# EAGLE board codec_controller (EAGLE 6.4)
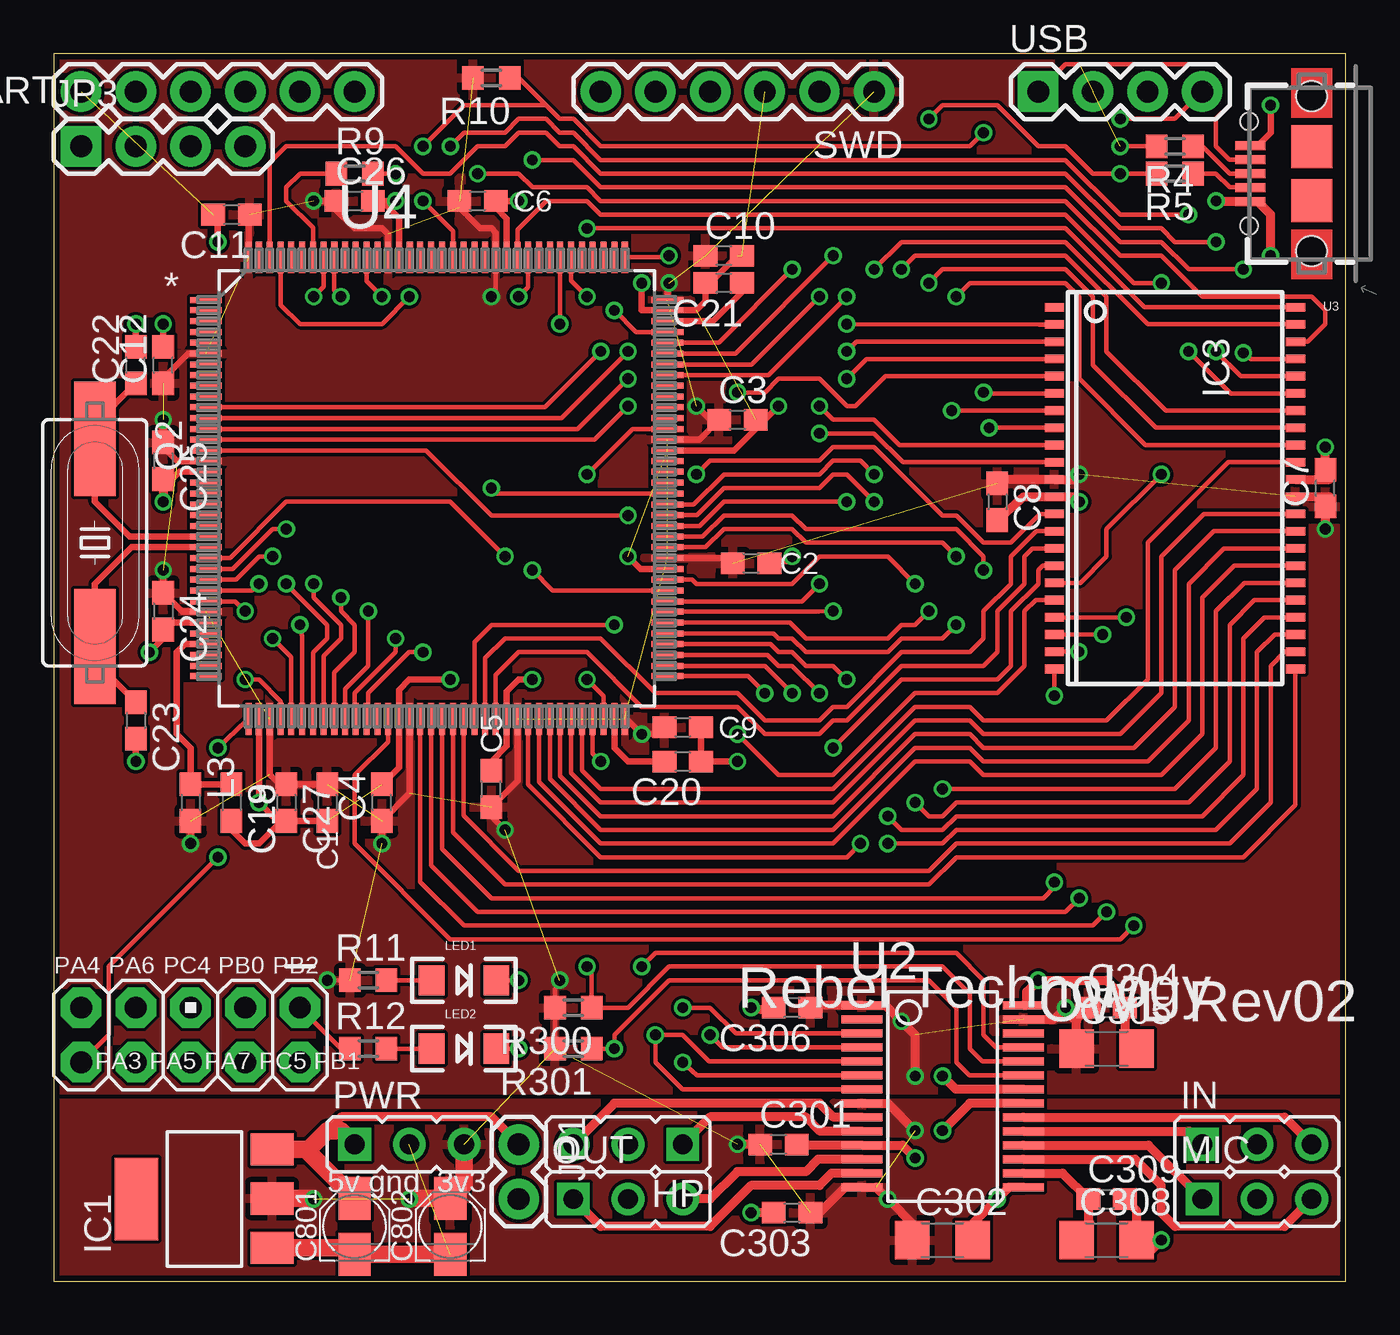
[diagram p0: board, top side]
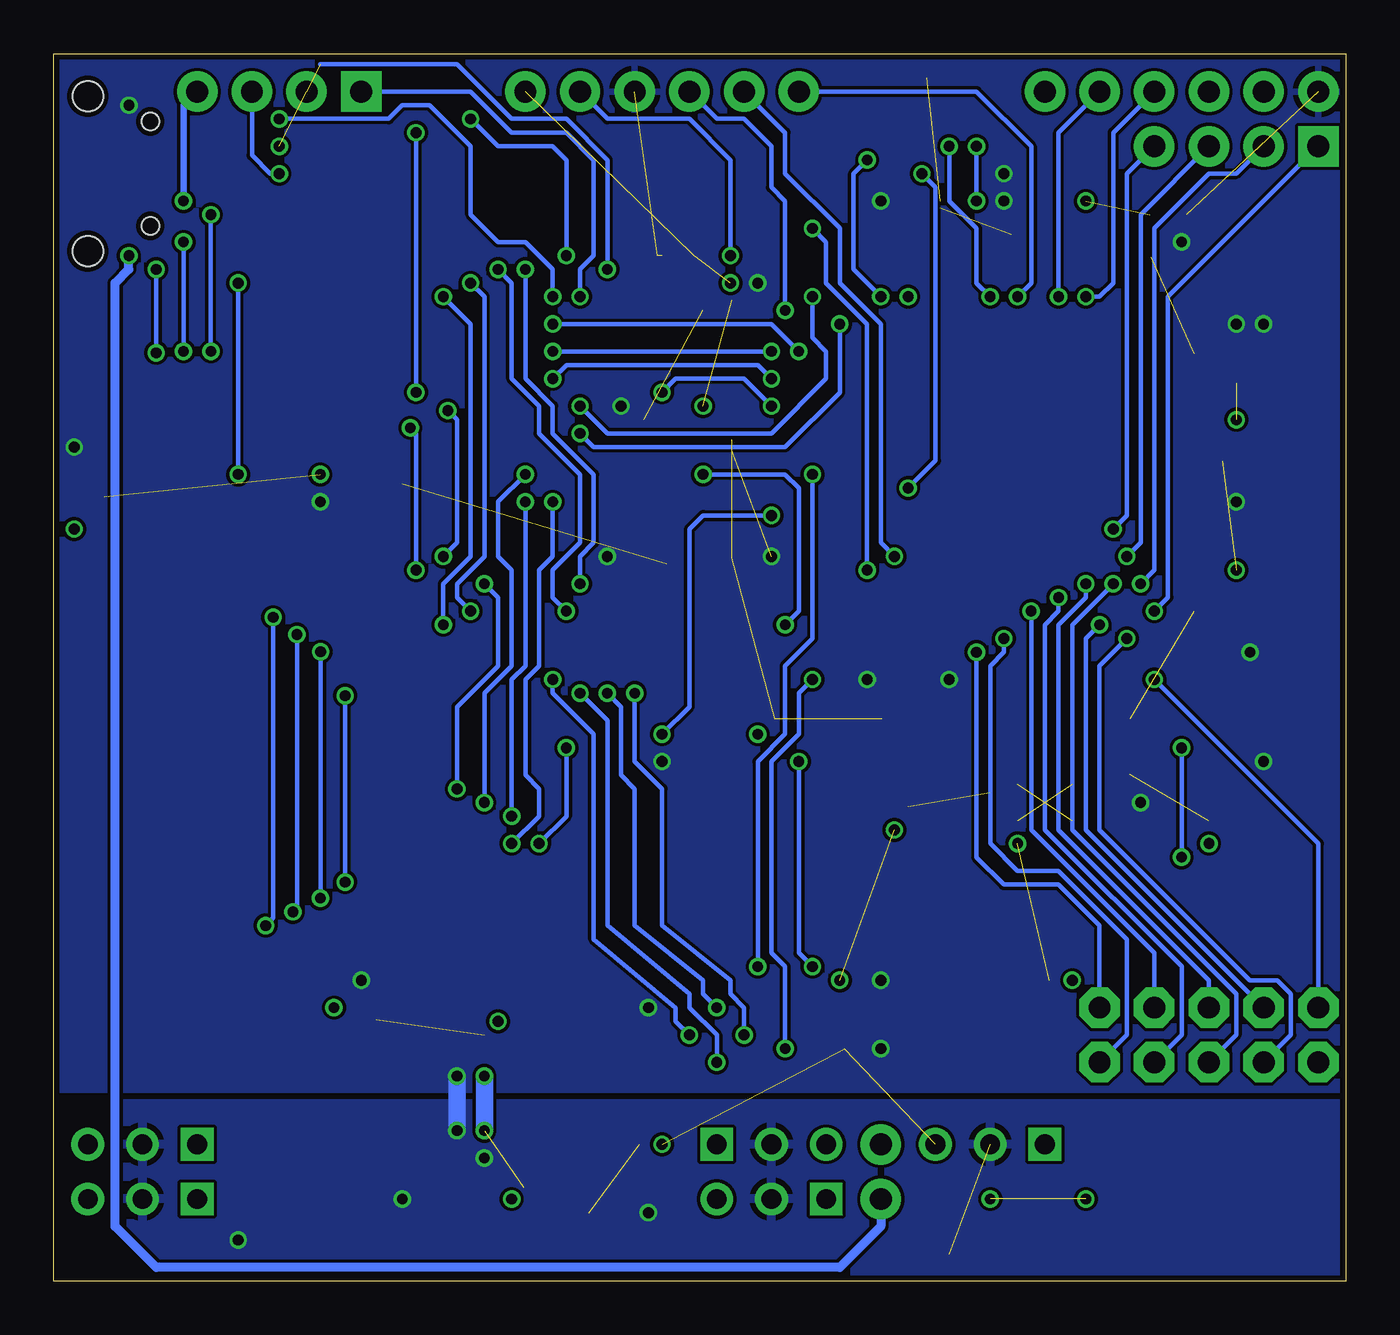
[diagram p1: board, bottom side, seen from below]

Size 60 x 57 mm. Coordinates in mm from the lower left corner, seen from the top.
Outline: 0,0 60,0 60,57 0,57 0,0
Copper layers (1*16): Top 0.035mm / dielectric 1.5mm / Bottom 0.035mm
Design rules "default *": minimum track width 6mil, minimum drill 12mil, track to track 6mil, track to pad 6mil, pad to pad 6mil, via to via 6mil, smd to smd 0mil, copper to edge 10mil, drill to drill 10mil, minimum pad ring 12mil, minimum via ring 6mil, stop-mask expansion 2mil, vias tented up to drill 100mil, thermal gap 10mil

## Footprints (pad centres in the part's own frame; a part is rotated, then mirrored left to right if it is on the bottom)
C0603 = smd 1.1 x 1: 1 -0.85,0; 2 0.85,0
C1206 = smd 1.6 x 1.8: 1 -1.4,0; 2 1.4,0
PANASONIC_A = smd 2 x 1.5: + 1.3,0; - -1.3,0
JMP/3P/SIP = drill 0.914 pad 1.524 square: 1 -2.54,0 | drill 0.914 pad 1.524: 2 0,0; 3 2.54,0
SOT223 = smd 1.499 x 2.007: 1 -2.261,-3.15; 2 0.025,-3.15; 3 2.311,-3.15 | smd 3.81 x 2.007: 4 0,3.15
TSOP44-II = smd 0.4 x 0.9: 1 -8.4,-5.6; 2 -7.6,-5.6; 3 -6.8,-5.6; 4 -6,-5.6; 5 -5.2,-5.6; 6 -4.4,-5.6; 7 -3.6,-5.6; 8 -2.8,-5.6; 9 -2,-5.6; 10 -1.2,-5.6; 11 -0.4,-5.6; 12 0.4,-5.6; 13 1.2,-5.6; 14 2,-5.6; 15 2.8,-5.6; 16 3.6,-5.6; 17 4.4,-5.6; 18 5.2,-5.6; 19 6,-5.6; 20 6.8,-5.6; 21 7.6,-5.6; 22 8.4,-5.6; 23 8.4,5.6; 24 7.6,5.6; 25 6.8,5.6; 26 6,5.6; 27 5.2,5.6; 28 4.4,5.6; 29 3.6,5.6; 30 2.8,5.6; 31 2,5.6; 32 1.2,5.6; 33 0.4,5.6; 34 -0.4,5.6; 35 -1.2,5.6; 36 -2,5.6; 37 -2.8,5.6; 38 -3.6,5.6; 39 -4.4,5.6; 40 -5.2,5.6; 41 -6,5.6; 42 -6.8,5.6; 43 -7.6,5.6; 44 -8.4,5.6
1X02 = drill 1.016 pad 1.88: 1 0,0; 2 2.54,0
AVR_ICSP = drill 1.016 pad 1.88 octagon: 1 -1.27,5.08; 2 1.27,5.08; 3 -1.27,2.54; 4 1.27,2.54; 5 -1.27,0; 6 1.27,0; 7 -1.27,-2.54; 8 1.27,-2.54; 9 -1.27,-5.08; 10 1.27,-5.08
1X04 = drill 1.016 pad 1.88 square: 1 0,0 | drill 1.016 pad 1.88: 2 2.54,0; 3 5.08,0; 4 7.62,0
0603 = smd 1.1 x 1: 1 -0.85,0; 2 0.85,0
LED-1206 = smd 1.2 x 1.4: A -1.5,0; C 1.5,0
HC49UP = smd 5.334 x 1.93: 1 -4.826,0; 2 4.826,0
R0603 = smd 1 x 1.1: 1 -0.85,0; 2 0.85,0
1X06 = drill 1.016 pad 1.88: 1 0,0; 2 2.54,0; 3 5.08,0; 4 7.62,0; 5 10.16,0; 6 12.7,0
28-SSOP = smd 0.381 x 1.905: P$1 -4.55,-3.752; P$2 -3.9,-3.752; P$3 -3.25,-3.752; P$4 -2.6,-3.752; P$5 -1.95,-3.752; P$6 -1.3,-3.752; P$7 -0.65,-3.752; P$8 0,-3.752; P$9 0.65,-3.752; P$10 1.3,-3.752; P$11 1.95,-3.752; P$12 2.6,-3.752; P$13 3.25,-3.752; P$14 3.9,-3.752; P$15 3.9,3.752; P$16 3.25,3.752; P$17 2.6,3.752; P$18 1.95,3.752; P$19 1.3,3.752; P$20 0.65,3.752; P$21 0,3.752; P$22 -0.65,3.752; P$23 -1.3,3.752; P$24 -1.95,3.752; P$25 -2.6,3.752; P$26 -3.25,3.752; P$27 -3.9,3.752; P$28 -4.55,3.752
USB-AB-MICRO-SMD = smd 1.4 x 0.4: D+ 2.85,0; D- 2.85,0.65; GND 2.85,-1.3; ID 2.85,-0.65; VBUS 2.85,1.3 | smd 1.9 x 2: P$6 0,1.25; P$7 0,-1.25 | hole 1.4: 0,3.6; 0,-3.6 | hole 0.8: 2.9,2.425; 2.9,-2.425
QFP50P2200X2200X160-144N = smd 1.473 x 0.279: 1 -10.719,8.738; 2 -10.719,8.255; 3 -10.719,7.747; 4 -10.719,7.239; 5 -10.719,6.756; 6 -10.719,6.248; 7 -10.719,5.74; 8 -10.719,5.258; 9 -10.719,4.75; 10 -10.719,4.242; 11 -10.719,3.759; 12 -10.719,3.251; 13 -10.719,2.743; 14 -10.719,2.261; 15 -10.719,1.753; 16 -10.719,1.245; 17 -10.719,0.762; 18 -10.719,0.254; 19 -10.719,-0.254; 20 -10.719,-0.762; 21 -10.719,-1.245; 22 -10.719,-1.753; 23 -10.719,-2.261; 24 -10.719,-2.743; 25 -10.719,-3.251; 26 -10.719,-3.759; 27 -10.719,-4.242; 28 -10.719,-4.75; 29 -10.719,-5.258; 30 -10.719,-5.74; 31 -10.719,-6.248; 32 -10.719,-6.756; 33 -10.719,-7.239; 34 -10.719,-7.747; 35 -10.719,-8.255; 36 -10.719,-8.738; 73 10.719,-8.738; 74 10.719,-8.255; 75 10.719,-7.747; 76 10.719,-7.239; 77 10.719,-6.756; 78 10.719,-6.248; 79 10.719,-5.74; 80 10.719,-5.258; 81 10.719,-4.75; 82 10.719,-4.242; 83 10.719,-3.759; 84 10.719,-3.251; 85 10.719,-2.743; 86 10.719,-2.261; 87 10.719,-1.753; 88 10.719,-1.245; 89 10.719,-0.762; 90 10.719,-0.254; 91 10.719,0.254; 92 10.719,0.762; 93 10.719,1.245; 94 10.719,1.753; 95 10.719,2.261; 96 10.719,2.743; 97 10.719,3.251; 98 10.719,3.759; 99 10.719,4.242; 100 10.719,4.75; 101 10.719,5.258; 102 10.719,5.74; 103 10.719,6.248; 104 10.719,6.756; 105 10.719,7.239; 106 10.719,7.747; 107 10.719,8.255; 108 10.719,8.738 | smd 0.279 x 1.473: 37 -8.738,-10.719; 38 -8.255,-10.719; 39 -7.747,-10.719; 40 -7.239,-10.719; 41 -6.756,-10.719; 42 -6.248,-10.719; 43 -5.74,-10.719; 44 -5.258,-10.719; 45 -4.75,-10.719; 46 -4.242,-10.719; 47 -3.759,-10.719; 48 -3.251,-10.719; 49 -2.743,-10.719; 50 -2.261,-10.719; 51 -1.753,-10.719; 52 -1.245,-10.719; 53 -0.762,-10.719; 54 -0.254,-10.719; 55 0.254,-10.719; 56 0.762,-10.719; 57 1.245,-10.719; 58 1.753,-10.719; 59 2.261,-10.719; 60 2.743,-10.719; 61 3.251,-10.719; 62 3.759,-10.719; 63 4.242,-10.719; 64 4.75,-10.719; 65 5.258,-10.719; 66 5.74,-10.719; 67 6.248,-10.719; 68 6.756,-10.719; 69 7.239,-10.719; 70 7.747,-10.719; 71 8.255,-10.719; 72 8.738,-10.719; 109 8.738,10.719; 110 8.255,10.719; 111 7.747,10.719; 112 7.239,10.719; 113 6.756,10.719; 114 6.248,10.719; 115 5.74,10.719; 116 5.258,10.719; 117 4.75,10.719; 118 4.242,10.719; 119 3.759,10.719; 120 3.251,10.719; 121 2.743,10.719; 122 2.261,10.719; 123 1.753,10.719; 124 1.245,10.719; 125 0.762,10.719; 126 0.254,10.719; 127 -0.254,10.719; 128 -0.762,10.719; 129 -1.245,10.719; 130 -1.753,10.719; 131 -2.261,10.719; 132 -2.743,10.719; 133 -3.251,10.719; 134 -3.759,10.719; 135 -4.242,10.719; 136 -4.75,10.719; 137 -5.258,10.719; 138 -5.74,10.719; 139 -6.248,10.719; 140 -6.756,10.719; 141 -7.239,10.719; 142 -7.747,10.719; 143 -8.255,10.719; 144 -8.738,10.719

## Placement (x,y rotation side)
C1  1u  [C0603]  12.7,22.23 270 top
C2  100n  [C0603]  32.38,33.34 0 top
C3  100n  [C0603]  31.75,40.01 0 top
C4  100n  [C0603]  15.24,22.23 90 top
C5  100n  [C0603]  20.32,22.86 90 top
C6  100n  [C0603]  19.68,50.16 0 top
C7  100n  [C0603]  59.05,36.83 90 top
C8  100n  [C0603]  43.81,36.2 270 top
C9  100n  [C0603]  29.21,25.72 0 top
C10  100n  [C0603]  31.11,47.62 0 top
C11  100n  [C0603]  8.26,49.53 180 top
C12  100n  [C0603]  5.08,42.55 90 top
C18  1u  [C0603]  8.26,22.23 270 top
C19  100n  [C0603]  8.26,22.23 270 top
C20  2u2  [C0603]  29.21,24.13 180 top
C21  2u2  [C0603]  31.11,46.35 180 top
C22  20pF  [C0603]  3.81,42.55 90 top
C23  20pF  [C0603]  3.81,26.04 270 top
C24  100n  [C0603]  5.08,31.11 270 top
C25  100n  [C0603]  5.08,38.1 270 top
C26  100n  [C0603]  13.97,50.16 0 top
C27  100n  [C0603]  10.79,22.23 270 top
C301  100n  [C0603]  33.66,6.35 0 top
C302  10u  [C1206]  41.27,1.91 0 top
C303  100n  [C0603]  34.29,3.17 180 top
C304  100n  [C0603]  48.9,12.7 0 top
C305  10u  [C1206]  48.9,10.79 0 top
C306  100n  [C0603]  34.29,12.7 180 top
C308  10u  [C1206]  48.9,1.91 0 top
C309  100n  [C0603]  48.9,3.81 0 top
C801  10u  [PANASONIC_A]  13.97,2.54 90 top
C802  10u  [PANASONIC_A]  18.41,2.54 90 top
HP  [JMP/3P/SIP]  26.67,6.35 180 top
IC1  REG1117  [SOT223]  6.99,3.81 90 top
IC3  IS61WV51216BLL-10TLI  [TSOP44-II]  52.07,36.83 270 top
IN  [JMP/3P/SIP]  55.88,6.35 0 top
JP1  [1X02]  21.59,6.35 270 top
JP2  M05X2PTH  [AVR_ICSP]  6.35,11.43 270 top
JP3  [1X04]  1.27,52.7 0 top
L3  INDUCTOR  [0603]  6.35,22.23 270 top
LED1  [LED-1206]  19.05,13.97 0 top
LED2  [LED-1206]  19.05,10.79 0 top
MIC  [JMP/3P/SIP]  55.88,3.81 0 top
OUT  [JMP/3P/SIP]  26.67,3.81 0 top
PWR  [JMP/3P/SIP]  16.51,6.35 0 top
Q2  [HC49UP]  1.91,34.29 270 top
R4  22R  [R0603]  52.07,52.7 180 top
R5  22R  [R0603]  52.07,51.44 180 top
R9  10K  [R0603]  13.97,51.44 0 top
R10  10K  [R0603]  20.32,55.88 180 top
R11  1k  [R0603]  14.61,13.97 0 top
R12  1k  [R0603]  14.61,10.79 0 top
R300  4k7  [R0603]  24.13,12.7 180 top
R301  4k7  [R0603]  24.13,10.79 180 top
SWD  [1X06]  38.1,55.24 180 top
U2  WM8731  [28-SSOP]  41.27,8.26 270 top
U3  [USB-AB-MICRO-SMD]  58.42,51.44 180 top
U4  STM32F405ZGT6  [QFP50P2200X2200X160-144N]  17.78,36.83 0 top
UART  [1X06]  1.27,55.24 0 top
USB  [1X04]  45.72,55.24 0 top

## Library data of the parts
C1-C12 C18-C27 C301-C306 C308 C309 C801 C802 R4 R5 R9-R12 R300 R301 = resistor
HP IN MIC OUT PWR U2 = audioint
IC1 = burr-brown; MPN: REG1117; OC_FARNELL: 1097566; OC_NEWARK: 14P6981
IC3 L3 = Rebel
JP1-JP3 LED1 LED2 SWD UART USB = SparkFun
Q2 = crystal; OC_FARNELL: unknown; OC_NEWARK: unknown
U3 = SparkFun-Connectors
U4 = Rebel; MPN: STM32F405ZGT6; OC_FARNELL: 2215225; OC_NEWARK: 46W2200; PACKAGE: 144LQFP; SUPPLIER: STMicroelectronics

## Nets
+3V3: C1.1 C2.1 C3.1 C4.1 C5.1 C6.1 C7.1 C8.1 C9.1 C10.1 C11.1 C12.1 C24.1 C25.1 C26.1 C27.1 C301.1 C302.1 C303.1 C304.1 C305.1 C306.1 C802.+ IC1.2 IC3.11 IC3.33 L3.2 PWR.3 R10.2 R11.1 R300.2 R301.2 SWD.1 U2.P$1 U2.P$8 U2.P$14 U2.P$27 U4.6 U4.16 U4.30 U4.39 U4.52 U4.62 U4.72 U4.84 U4.95 U4.108 U4.121 U4.131 U4.144
+5V: C801.+ IC1.3 JP1.1 PWR.1
ADC1: JP3.4 U4.26
ADC2: JP3.3 U4.27
ADC3: JP3.2 U4.28
ADC4: JP3.1 U4.29
BOOT0: R9.1 U4.138
CLKOUT: U2.P$2
GND: C1.2 C2.2 C3.2 C4.2 C5.2 C6.2 C7.2 C8.2 C9.2 C10.2 C11.2 C12.2 C18.2 C19.2 C20.1 C21.2 C22.2 C23.2 C24.2 C25.2 C26.2 C27.2 C301.2 C302.2 C303.2 C304.2 C305.2 C306.2 C308.2 C309.2 C801.- C802.- HP.2 IC1.1 IC3.12 IC3.34 IN.2 LED1.C LED2.C MIC.2 OUT.2 PWR.2 R9.2 SWD.3 U2.P$11 U2.P$15 U2.P$21 U2.P$22 U2.P$28 U3.GND U4.17 U4.31 U4.38 U4.51 U4.61 U4.83 U4.94 U4.107 U4.120 U4.130 UART.1
I2C_SCL: R300.1 U2.P$24 U4.69
I2C_SDA: R301.1 U2.P$23 U4.70
I2S_LRCK: U2.P$5 U2.P$7 U4.73
I2S_MCLK: U2.P$25 U4.96
I2S_SCLK: U2.P$3 U4.74
I2S_SDI: U2.P$6 U4.75
I2S_SDO: U2.P$4 U4.76
L_IN: IN.3 U2.P$20
L_OUT: OUT.3 U2.P$12
N$1: MIC.3 U2.P$17
N$6: U4.49
N$8: HP.3 U2.P$9
N$10: LED1.A R11.2
N$11: LED2.A R12.2
N$14: U4.21
N$15: U4.22
N$17: R4.1 U3.D+
N$21: R5.1 U3.D-
N$23: C23.1 Q2.2 U4.24
N$24: C22.1 Q2.1 U4.23
N$43: MIC.1 U2.P$18
N$44: HP.1 U2.P$10
N$54: U4.91
N$75: U4.128
N$76: U4.129
N$77: U4.132
N$106: U4.126
N$107: U4.127
N$113: U4.143
N$123: U4.19
N$124: U4.18
N$136: U4.5
N$137: U4.4
N$138: U4.3
N$139: U4.2
N$140: U4.1
N$142: U4.93
N$143: U4.92
NRST: SWD.5 U4.25
PA0: U4.34
PA1: U4.35
PA2: U4.36
PA3: JP2.10 U4.37
PA4: JP2.9 U4.40
PA5: JP2.8 U4.41
PA6: JP2.7 U4.42
PA7: JP2.6 U4.43
PA8: U4.100
PA15: U4.110
PB0: JP2.3 U4.46
PB1: JP2.2 U4.47
PB2: JP2.1 R12.1 U4.48
PB4: U4.134
PB5: U4.135
PB8: U4.139
PB9: U4.140
PC4: JP2.5 U4.44
PC5: JP2.4 U4.45
PC7: U4.97
PC8: U4.98
PC9: U4.99
PC10: U4.111
PC11: U4.112
PC12: U4.113
PC13: U4.7
PC14: U4.8
PC15: U4.9
PD0: IC3.9 U4.114
PD1: IC3.10 U4.115
PD2: U4.116
PD3: U4.117
PD4: IC3.41 U4.118
PD5: IC3.17 U4.119
PD6: U4.122
PD7: U4.123
PD8: IC3.36 U4.77
PD9: IC3.37 U4.78
PD10: IC3.38 U4.79
PD11: IC3.43 U4.80
PD12: IC3.44 U4.81
PD13: IC3.28 U4.82
PD14: IC3.7 U4.85
PD15: IC3.8 U4.86
PE0: IC3.39 U4.141
PE1: IC3.40 U4.142
PE7: IC3.13 U4.58
PE8: IC3.14 U4.59
PE9: IC3.15 U4.60
PE10: IC3.16 U4.63
PE11: IC3.29 U4.64
PE12: IC3.30 U4.65
PE13: IC3.31 U4.66
PE14: IC3.32 U4.67
PE15: IC3.35 U4.68
PF0: U4.10
PF1: IC3.2 U4.11
PF2: IC3.3 U4.12
PF3: IC3.4 U4.13
PF4: IC3.5 U4.14
PF5: IC3.18 U4.15
PF9: U4.20
PF12: IC3.19 U4.50
PF13: IC3.20 U4.53
PF14: IC3.21 U4.54
PF15: IC3.22 U4.55
PFO: IC3.1
PG0: IC3.23 U4.56
PG1: IC3.24 U4.57
PG2: IC3.25 U4.87
PG3: IC3.26 U4.88
PG4: IC3.27 U4.89
PG5: IC3.42 U4.90
PG9: U4.124
PG10: IC3.6 R10.1 U4.125
R_IN: IN.1 U2.P$19
R_OUT: OUT.1 U2.P$13
SWCLK: SWD.2 U4.109
SWDIO: SWD.4 U4.105
SWO: SWD.6 U4.133
UART_RX: U4.136 UART.5
UART_TX: U4.137 UART.4
USB_DM: R5.2 U4.103 USB.3
USB_DP: R4.2 U4.104 USB.2
USB_ID: U3.ID U4.102 USB.1
USB_VBUS: JP1.2 U3.VBUS U4.101 USB.4
VCAP1: C20.2 U4.71
VCAP2: C21.1 U4.106
VCC/2: C308.1 C309.1 U2.P$16
VDDA: C18.1 C19.1 L3.1 U4.32 U4.33

## Tracks (layer width: path | path; a pad name or v marks a point on that pad's centre or on a via)
+3V3  (via drill 0.5)  (26 unrouted)
  Top 0.203: U4.72 26.59,26.11 | 28.04,25.4 C9.1 | 31.29,33.58 C2.1 | C5.1 20.32,21.59 | C3.1 30.48,40.01 | C6.1 18.84,49.85 | C26.1 13.12,49.74 | C27.1 10.48,23.07 | 59.24,36.43 C7.1 | U4.121 20.52,45.92 v20.32,45.72 | 44,37.23 C8.1 | v23.5,13.97 23.28,13.55 R300.2 R301.2 | R11.1 v12.7,13.97
  Top 0.305: 26.59,26.11 v27.3,25.4 28.04,25.4 | U4.108 28.5,46.28 v28.57,46.35 | U4.121 20.52,48.69 20.32,48.9 19.79,48.9 18.84,49.85 | U4.84 31.29,33.58 | U4.62 21.54,23.23 C5.1 | 20.32,21.59 v20.95,20.95 | U4.95 29.99,39.09 C3.1 | 30.48,40.01 v29.84,40.64 | U4.52 16.54,22.67 C4.1 v15.24,20.32 | 13.12,49.74 13.97,48.9 15.24,48.9 15.52,48.62 U4.131 | C26.1 v12.06,50.16 | U4.16 5.74,38.08 4.87,38.95 C25.1 | U4.39 10.03,23.52 10.48,23.07 | L3.2 v6.35,20.32 | C1.1 C27.1 | v5.08,33.02 C24.1 5.96,31.09 U4.30 | U4.6 6.25,43.08 5.08,41.91 C12.1 | U4.144 9.04,49.47 C11.1
  Top 0.406: v47.62,37.47 47.39,37.23 IC3.11 44,37.23 | IC3.33 59.24,36.43 | C7.1 v59.05,34.92 | v40.01,6.99 38.73,8.26 U2.P$8 | v40.01,9.53 40.01,11.43 v39.37,12.06 38.63,12.8 U2.P$1 35.24,12.8 C306.1 | C301.1 v31.75,6.35 | C303.1 35.56,3.17 36.74,4.36 U2.P$14 38.19,4.36 v38.73,3.81 40.01,2.54 40.01,2.04 C302.1 | C305.1 47.49,12.06 | 47.49,12.06 47.49,12.15 C304.1 | U2.P$27 46.45,12.15 v46.99,12.7 46.99,12.57 47.49,12.06 | C25.1 v5.08,40.01
  Top 0.813: PWR.3 19.05,4.47 C802.+ 16.54,3.84 v16.51,3.81 | IC1.2 12.04,3.83 v12.06,3.81
  Bottom 0.813: v40.01,6.99 v40.01,9.53
  pour Top: -0.64,59.69 -0.64,8.89 66.67,8.89 66.67,59.69
  pour Top: -0.64,8.26 -0.64,-0.64 66.67,-0.64 66.67,8.26
+5V
  Top 0.406: JP1.1 20.32,7.62 13.34,7.62 12.7,6.99
  Top 0.813: IC1.3 11.69,6.12 | 11.69,6.12 C801.+ | 11.69,6.12 11.84,6.12 12.7,6.99 13.34,6.99 PWR.1
ADC1  (via drill 0.5)
  Top 0.203: U4.26 8.31,33.07 10.16,34.92 v10.79,34.92
  Bottom 0.203: v10.79,34.92 10.16,35.56 10.16,51.44 JP3.4
ADC2  (via drill 0.5)
  Top 0.203: U4.27 8.46,32.59 9.53,33.66 v10.16,33.66
  Bottom 0.203: v10.16,33.66 9.53,34.29 9.53,49.53 JP3.3
ADC3  (via drill 0.5)
  Top 0.203: U4.28 9.22,32.08 v9.53,32.38
  Bottom 0.203: v9.53,32.38 8.89,33.02 8.89,48.9 6.35,51.44 5.08,51.44 JP3.2
ADC4  (via drill 0.5)
  Top 0.203: U4.29 8.43,31.57 v8.89,31.11
  Bottom 0.203: v8.89,31.11 8.26,31.75 8.26,45.72 JP3.1
BOOT0
  Top 0.203: U4.138 12.04,48.92 10.79,50.16 10.79,50.8 11.43,51.44 R9.1
GND  (via drill 0.5)  (7 unrouted)
  Top 0.203: C21.2 30.48,46.35 | C2.2 33.23,33.44 | 33.02,40.01 C3.2 32.6,39.59 | C6.2 20.54,49.85 | C26.2 15.24,50.16 | 10.38,21.38 C27.2 10.58,21.38 | 20.32,24.13 C5.2 | 59.24,37.23 C7.2 | R9.2 v15.88,51.44 | U3.GND 55.91,52.73 | LED2.C v21.59,10.79 | LED1.C v21.59,13.97
  Top 0.305: v31.75,24.13 C20.1 C9.2 | 30.48,46.35 31.75,47.62 | v27.3,46.35 27.3,45.09 U4.107 29.84,45.09 30.27,45.51 C21.2 | U4.120 21.03,49.35 20.54,49.85 | 20.32,24.13 21.03,24.84 U4.61 21.03,27.38 21.59,27.94 v22.23,27.94 | 33.02,40.01 v33.66,40.64 | C4.2 16.03,23.86 U4.51 16.03,27.46 16.51,27.94 v18.41,27.94 | 15.24,50.16 16.03,49.38 U4.130 | C25.2 5.5,37.25 | 5.5,37.25 5.84,37.59 U4.17 | U4.38 v9.53,22.23 10.38,21.38 | U4.94 31.6,38.58 32.6,39.59 | v26.67,33.66 27.25,33.07 U4.83 | C19.2 8.26,20.95 8.89,20.32 9.53,20.32 10.58,21.38 | C27.2 C1.2 | 34.55,6.3 C301.2 | C26.2 v15.88,50.16 | 33.23,33.44 34.08,33.44 v34.29,33.66 | C6.2 v21.59,50.16 | 5.5,37.25 5.08,36.83 | 55.91,52.73 56.52,53.34 v56.52,54.61 | C12.2 v5.08,44.45 | C22.2 v3.81,44.45 | U4.31 5.4,30.58 C24.2 5.08,29.84 v4.45,29.21 | C23.2 v3.81,24.13 | C11.2 7.62,49.53 v7.62,48.26
  Top 0.406: C8.2 45.06,36.43 IC3.12 47.39,36.43 v47.62,36.2 | IC3.34 59.24,37.23 | C7.2 v59.05,38.73 | 34.55,6.3 U2.P$11 39.41,6.3 v40.01,5.71 | 43.21,2.54 C302.2 42.55,2.04 42.55,2.54 v43.81,3.81 44.36,4.36 U2.P$15 | U2.P$21 42.55,8.26 v41.27,6.99 | U2.P$22 41.9,8.9 v41.27,9.53 | C303.2 v32.38,3.17 | C309.2 50.3,3.26 C308.2 50.93,1.4 v51.44,1.91 | U2.P$28 45.19,12.8 45.19,13.44 v45.72,13.97 48.9,13.97 49.53,13.34 49.53,12.91 | C305.2 49.74,11.35 C304.2 49.53,12.91 | C306.2 33.44,12.48 v32.38,12.7 | 49.53,12.91 49.53,12.7 | 5.08,36.83 v5.08,36.2
  Top 0.813: IC1.1 13.66,1.55 C801.- C802.-
  Bottom 0.813: v41.27,6.99 v41.27,9.53
  pour Bottom: -0.64,8.89 -0.64,59.69 66.67,59.69 66.67,8.89
  pour Bottom: -0.64,8.26 -0.64,-0.64 66.67,-0.64 66.67,8.26
I2C_SCL  (via drill 0.5)
  Top 0.203: U4.69 25.02,24.51 v25.4,24.13 | U2.P$24 43.13,10.21 42.55,10.79 42.55,13.34 41.27,14.61 28.57,14.61 26.67,12.7 25.4,12.7 | R300.1 24.98,14.39 v24.77,14.61
  Top 0.305: R300.1 25.4,12.7
  Bottom 0.203: v25.4,24.13 25.4,15.24 v24.77,14.61
I2C_SDA  (via drill 0.5)
  Top 0.203: U4.70 25.53,27.18 v24.77,27.94 | U2.P$23 42.52,9.55 41.91,10.16 41.91,12.7 40.64,13.97 28.57,13.97 26.04,11.43 v26.04,10.79 R301.1
  Bottom 0.203: v24.77,27.94 25.4,27.3 25.4,25.4 26.67,24.13 26.67,15.24 26.04,14.61 v26.04,10.79
I2S_LRCK  (via drill 0.5)
  Top 0.203: U4.73 32.23,28.09 v33.02,27.3 | U2.P$5 30.43,10.21 29.21,11.43 v27.94,11.43 27.94,10.16 29.2,8.9 U2.P$7
  Bottom 0.203: v27.94,11.43 27.94,12.7 28.57,13.34 28.57,13.97 31.75,16.51 31.75,22.86 33.02,24.13 v33.02,27.3
I2S_MCLK  (via drill 0.5)
  Top 0.203: U4.96 26.87,39.57 v24.77,37.47 | v27.3,14.61 27.94,15.24 41.91,15.24 43.18,13.97 43.18,11.43 43.76,10.86 U2.P$25
  Bottom 0.203: v24.77,37.47 24.77,29.84 26.04,28.57 26.04,25.4 27.3,24.13 v27.3,14.61
I2S_SCLK  (via drill 0.5)
  Top 0.203: U4.74 33.02,28.57 v34.29,27.3 | v29.21,12.7 30.48,12.7 31.68,11.51 U2.P$3
  Bottom 0.203: v29.21,12.7 29.84,13.34 29.84,13.97 33.02,16.51 33.02,22.86 33.66,23.5 33.66,26.67 v34.29,27.3
I2S_SDI  (via drill 0.5)
  Top 0.203: U2.P$6 29.88,9.55 v29.21,10.16 | U4.75 33.15,29.08 33.66,28.57 34.29,28.57 v35.56,27.3
  Bottom 0.203: v29.21,10.16 29.21,11.43 30.48,12.7 30.48,13.34 34.29,16.51 34.29,26.04 v35.56,27.3
I2S_SDO  (via drill 0.5)
  Top 0.203: U2.P$4 31.05,10.86 v30.48,11.43 | U4.76 33.27,29.59 33.66,29.21 34.29,29.21 34.92,28.57 36.2,28.57 v36.83,27.94
  Bottom 0.203: v30.48,11.43 31.11,12.06 31.11,12.7 34.92,15.88 34.92,25.4 36.83,27.3 v36.83,27.94
L_IN
  Top 0.406: U2.P$20 57.16,7.61 IN.3
L_OUT
  Top 0.406: U2.P$12 35.5,5.66 34.92,5.08 31.75,5.08 30.48,3.81 OUT.3
N$1
  Top 0.406: MIC.3 57.15,2.54 52.07,2.54 51.44,3.17 51.44,4.45 50.23,5.66 U2.P$17
N$8
  Top 0.406: U2.P$9 36.21,7.61 35.56,8.26 26.04,8.26 HP.3
N$10
  Top 0.203: R11.2 LED1.A
N$11
  Top 0.203: R12.2 LED2.A
N$17
  Top 0.203: U3.D+ 54.61,51.44 53.34,52.7 R4.1
N$21
  Top 0.203: R5.1 53.98,51.44 54.61,50.8 55.55,50.8 U3.D-
N$23
  Top 0.305: C23.1 1.91,28.79 Q2.2 1.91,32.38 3.61,34.09 U4.24
N$24
  Top 0.305: U4.23 3.53,34.57 1.91,36.2 Q2.1 | Q2.1 1.91,38.73 | Q2.1 1.91,39.79 C22.1
N$43
  Top 0.406: U2.P$18 50.84,6.3 MIC.1
N$44
  Top 0.406: U2.P$10 35.59,6.96 34.92,7.62 30.48,7.62 HP.1
NRST  (via drill 0.5)
  Top 0.203: 20.88,33.58 v20.95,33.66 18.41,36.2 10.79,36.2 8.18,33.58 U4.25
  Bottom 0.203: v20.95,33.66 21.59,34.29 21.59,44.45 23.5,46.35 23.5,48.9 26.04,51.44 26.04,53.34 SWD.5
PA3  (via drill 0.5)
  Top 0.203: JP2.10 2.54,11.43 2.54,14.61 v7.62,19.68 | v7.62,24.77 8.97,26.04 U4.37
  Bottom 0.203: v7.62,19.68 v7.62,24.77
PA4  (via drill 0.5)
  Top 0.203: U4.40 10.54,26.92 9.53,27.94 v8.89,27.94
  Bottom 0.203: JP2.9 1.27,20.32 v8.89,27.94
PA5  (via drill 0.5)
  Top 0.203: U4.41 11.02,28.98 v10.16,29.84
  Bottom 0.203: JP2.8 2.54,11.43 2.54,13.34 3.17,13.97 4.45,13.97 11.43,20.95 11.43,28.57 v10.16,29.84
PA6  (via drill 0.5)
  Top 0.203: U4.42 11.53,29.95 v11.43,30.48
  Bottom 0.203: JP2.7 12.06,20.95 12.06,29.84 v11.43,30.48
PA7  (via drill 0.5)
  Top 0.203: U4.43 12.04,29.18 12.7,29.84 12.7,30.48 v10.79,32.38
  Bottom 0.203: v10.79,32.38 12.7,30.48 12.7,20.95 5.08,13.34 5.08,11.43 JP2.6
PB0  (via drill 0.5)
  Top 0.203: U4.46 13.54,27.51 14.61,28.57 v14.61,31.11
  Bottom 0.203: v14.61,31.11 14.61,20.95 8.89,15.24 JP2.3
PB1  (via drill 0.5)
  Top 0.203: U4.47 13.97,26.16 13.97,27.3 15.88,29.21 v15.88,29.84
  Bottom 0.203: v15.88,29.84 15.88,29.21 16.51,28.57 16.51,20.32 15.24,19.05 13.34,19.05 10.16,15.88 10.16,11.43 JP2.2
PB2  (via drill 0.5)
  Top 0.203: U4.48 14.61,26.19 14.61,27.3 16.51,29.21 v17.14,29.21 | R12.1 13.34,10.79 JP2.1
  Bottom 0.203: v17.14,29.21 17.14,19.68 15.88,18.41 13.34,18.41 11.43,16.51 JP2.1
PC4  (via drill 0.5)
  Top 0.203: U4.44 12.52,29.03 13.34,29.84 13.34,30.48 12.06,31.75 v12.06,32.38
  Bottom 0.203: JP2.5 6.35,13.97 13.34,20.95 13.34,30.48 12.06,31.75 v12.06,32.38
PC5  (via drill 0.5)
  Top 0.203: U4.45 13.03,28.27 13.97,29.21 13.97,30.48 13.34,31.11 v13.34,31.75
  Bottom 0.203: v13.34,31.75 13.34,31.11 13.97,30.48 13.97,20.95 7.62,14.61 7.62,11.43 JP2.4
PD0  (via drill 0.5)
  Top 0.203: IC3.9 39.27,38.83 38.1,40.01 36.2,40.01 v35.56,40.64 | U4.114 24.03,46.46 v24.77,45.72
  Bottom 0.203: v24.77,45.72 24.77,43.81 24.13,43.18 24.13,41.91 26.67,39.37 34.29,39.37 v35.56,40.64
PD1  (via drill 0.5)
  Top 0.203: IC3.10 39.44,38.03 38.1,39.37 v35.56,39.37 | U4.115 23.52,44.48 v23.5,44.45
  Bottom 0.203: v35.56,39.37 34.92,38.73 26.04,38.73 23.5,41.27 v23.5,44.45
PD4  (via drill 0.5)
  Top 0.203: v22.23,52.07 24.13,52.07 25.4,50.8 46.99,50.8 49.53,48.26 51.44,48.26 52.7,46.99 v55.24,46.99 | IC3.41 55.59,42.83 v55.24,43.12 | U4.118 22.02,46.15 v21.59,45.72
  Bottom 0.203: v55.24,46.99 v55.24,43.12 | v21.59,45.72 22.86,46.99 22.86,51.44 v22.23,52.07
PD5  (via drill 0.5)
  Top 0.203: IC3.17 47.67,32.43 48.9,33.66 48.9,34.92 v51.44,37.47 | U4.119 21.54,48.84 22.86,50.16 24.77,50.16 25.4,49.53 46.99,49.53 50.16,46.35 v51.44,46.35
  Bottom 0.203: v51.44,37.47 v51.44,46.35
PD8  (via drill 0.5)
  Top 0.203: IC3.36 50.7,38.83 47.62,41.91 47.62,45.72 46.99,46.35 42.55,46.35 v41.91,45.72 | v41.91,30.48 41.27,29.84 39.37,29.84 38.73,29.21 34.92,29.21 34.29,29.84 33.66,29.84 33.43,30.07 U4.77
  Bottom 0.203: v41.91,45.72 40.64,44.45 40.64,33.66 41.91,32.38 v41.91,30.48
PD9  (via drill 0.5)
  Top 0.203: IC3.37 51.17,39.63 48.26,42.55 48.26,45.72 46.99,46.99 41.27,46.99 v40.64,46.35 | U4.78 34.19,30.58 34.92,29.84 38.73,29.84 39.37,30.48 40.01,30.48 v40.64,31.11
  Bottom 0.203: v40.64,31.11 41.27,31.75 41.27,32.38 40.01,33.66 40.01,45.72 v40.64,46.35
PD10  (via drill 0.5)
  Top 0.203: IC3.38 51.65,40.43 48.9,43.18 48.9,45.72 46.99,47.62 40.01,47.62 v39.37,46.99 | U4.79 35.53,31.09 v36.2,31.11
  Bottom 0.203: v39.37,46.99 38.73,46.35 38.73,41.91 37.47,40.64 37.47,39.37 35.56,37.47 35.56,34.29 36.83,33.02 36.83,31.75 v36.2,31.11
PD11  (via drill 0.5)
  Top 0.203: U4.80 34.75,31.57 v35.56,32.38 | v38.1,46.99 39.37,48.26 46.99,48.26 50.8,44.45 57.65,44.45 IC3.43
  Bottom 0.203: v35.56,32.38 35.56,33.66 34.92,34.29 34.92,37.47 36.83,39.37 36.83,40.64 38.1,41.91 v38.1,46.99
PD12  (via drill 0.5)
  Top 0.203: U4.81 23.16,32.08 v22.23,33.02 | v24.77,48.9 46.99,48.9 50.66,45.23 IC3.44
  Bottom 0.203: v22.23,33.02 22.23,44.45 24.13,46.35 24.13,48.26 v24.77,48.9
PD13  (via drill 0.5)
  Top 0.203: IC3.28 55.29,32.43 53.98,31.11 53.98,24.77 52.07,22.86 v41.27,22.86 | U4.82 29.64,32.59 29.84,32.38 34.29,32.38 35.56,33.66 38.73,33.66 v40.01,32.38
  Bottom 0.203: v41.27,22.86 41.27,26.67 39.37,28.57 39.37,31.75 v40.01,32.38
PD14  (via drill 0.5)
  Top 0.203: U4.85 30.28,34.09 31.11,34.92 34.29,34.92 34.92,34.29 41.27,34.29 v41.91,33.66 | IC3.7 v41.7,40.43
  Bottom 0.203: v41.7,40.43 41.27,40.01 41.27,34.29 v41.91,33.66
PD15  (via drill 0.5)
  Top 0.203: IC3.8 v43.44,39.63 | U4.86 30.12,34.57 31.11,35.56 34.29,35.56 34.92,34.92 41.91,34.92 43.18,33.66 v43.18,33.02
  Bottom 0.203: v43.18,33.02 43.18,39.37 v43.44,39.63
PE0  (via drill 0.5)
  Top 0.203: IC3.39 54.66,41.23 v52.7,43.18 | v18.41,52.7 19.05,53.34 20.95,53.34 21.59,53.98 22.86,53.98 23.5,53.34 24.13,53.34 25.4,52.07 46.99,52.07 49.53,49.53 v52.7,49.53 | U4.141 10.54,45.34 11.43,44.45 15.24,44.45 v16.51,45.72
  Bottom 0.203: v52.7,43.18 v52.7,49.53 | v18.41,52.7 18.41,50.16 17.14,48.9 17.14,46.35 v16.51,45.72
PE1  (via drill 0.5)
  Top 0.203: U4.142 10.03,51.94 10.79,52.7 15.88,52.7 17.14,51.44 18.41,51.44 19.68,52.7 20.95,52.7 21.59,53.34 22.86,53.34 23.5,52.7 24.13,52.7 25.4,51.44 46.99,51.44 49.53,48.9 51.44,48.9 52.07,48.26 v53.98,48.26 | IC3.40 55.12,42.03 v53.98,43.18
  Bottom 0.203: v53.98,43.18 v53.98,48.26
PE7  (via drill 0.5)
  Top 0.203: U4.58 19.53,29.69 20.32,30.48 v26.04,30.48 | v29.84,37.47 30.48,38.1 35.56,38.1 36.2,38.73 38.1,38.73 41.27,35.56 41.91,35.56 43.18,34.29 44.45,34.29 45.79,35.63 IC3.13
  Bottom 0.203: v26.04,30.48 25.4,31.11 25.4,36.83 26.04,37.47 v29.84,37.47
PE8
  Top 0.203: IC3.14 45.62,34.83 44.45,33.66 44.45,32.38 43.18,31.11 43.18,29.84 42.55,29.21 39.37,29.21 36.83,26.67 36.2,26.67 35.56,26.04 33.02,26.04 31.75,27.3 27.94,27.3 25.4,29.84 20.95,29.84 20.04,28.93 U4.59
PE9
  Top 0.203: U4.60 20.52,28.14 21.59,29.21 24.77,29.21 27.3,26.67 31.75,26.67 33.02,25.4 35.56,25.4 36.2,26.04 36.83,26.04 39.37,28.57 43.18,28.57 43.81,29.21 43.81,31.11 45.09,32.38 45.09,33.66 45.46,34.03 IC3.15
PE10  (via drill 0.5)
  Top 0.203: v36.2,24.77 39.37,27.94 43.81,27.94 44.45,28.57 44.45,31.11 45.72,32.38 45.72,33.02 45.93,33.23 IC3.16 | v37.47,20.32 36.83,19.68 25.4,19.68 22.02,23.06 U4.63
  Bottom 0.203: v36.2,24.77 36.2,21.59 v37.47,20.32
PE11
  Top 0.203: IC3.29 54.82,33.23 53.34,31.75 53.34,25.4 51.44,23.5 43.18,23.5 42.55,24.13 40.01,24.13 36.2,20.32 25.4,20.32 22.53,23.19 U4.64
PE12
  Top 0.203: IC3.30 54.35,34.03 52.7,32.38 52.7,26.04 50.8,24.13 43.18,24.13 42.55,24.77 40.01,24.77 36.2,20.95 25.4,20.95 23.04,23.32 U4.65
PE13
  Top 0.203: IC3.31 53.88,34.83 52.07,33.02 52.07,26.67 50.16,24.77 43.18,24.77 42.55,25.4 40.01,25.4 36.2,21.59 25.4,21.59 23.52,23.47 U4.66
PE14
  Top 0.203: IC3.32 53.41,35.63 51.44,33.66 51.44,27.3 49.53,25.4 43.18,25.4 42.55,26.04 40.01,26.04 36.2,22.23 25.4,22.23 24.03,23.6 U4.67
PE15
  Top 0.203: IC3.35 54.54,38.03 50.8,34.29 50.8,27.94 48.9,26.04 43.18,26.04 42.55,26.67 40.01,26.67 36.2,22.86 25.4,22.86 24.54,23.72 U4.68
PF1  (via drill 0.5)
  Top 0.203: IC3.2 45.74,44.43 v36.83,44.45 | U4.11 22.81,40.59 v25.4,43.18
  Bottom 0.203: v36.83,44.45 26.67,44.45 v25.4,43.18
PF2  (via drill 0.5)
  Top 0.203: IC3.3 37.28,43.63 v36.83,43.18 | U4.12 23.57,40.08 v26.67,43.18
  Bottom 0.203: v26.67,43.18 v36.83,43.18
PF3  (via drill 0.5)
  Top 0.203: IC3.4 37.75,42.83 v36.83,41.91 | v26.67,41.91 24.33,39.57 U4.13
  Bottom 0.203: v26.67,41.91 27.3,42.55 36.2,42.55 v36.83,41.91
PF4  (via drill 0.5)
  Top 0.203: IC3.5 38.62,42.03 37.23,40.64 36.83,40.64 35.56,41.91 33.66,41.91 33.02,41.27 v31.75,41.27 | v26.67,40.64 25.12,39.09 U4.14
  Bottom 0.203: v26.67,40.64 27.94,41.91 31.11,41.91 v31.75,41.27
PF5  (via drill 0.5)
  Top 0.203: U4.15 17.3,38.58 20.32,35.56 v26.67,35.56 | v31.75,25.4 33.66,23.5 36.2,23.5 40.01,27.3 43.81,27.3 45.09,28.57 45.09,31.11 45.6,31.63 IC3.18
  Bottom 0.203: v31.75,25.4 30.48,26.67 30.48,34.92 29.84,35.56 v26.67,35.56
PF12  (via drill 0.5)
  Top 0.203: IC3.19 v49.81,30.83 | U4.50 15.52,25.04 13.97,23.5 13.97,20.32 18.41,15.88 49.53,15.88 v50.16,16.51
  Bottom 0.203: v49.81,30.83 49.81,16.86 v50.16,16.51
PF13  (via drill 0.5)
  Top 0.203: U4.53 17.02,18.54 19.05,16.51 48.26,16.51 v48.9,17.14 | IC3.20 v48.71,30.03
  Bottom 0.203: v48.71,30.03 48.71,17.33 v48.9,17.14
PF14  (via drill 0.5)
  Top 0.203: IC3.21 v47.6,29.23 | U4.54 17.53,19.3 19.68,17.14 46.99,17.14 v47.62,17.78
  Bottom 0.203: v47.6,29.23 47.6,17.8 v47.62,17.78
PF15  (via drill 0.5)
  Top 0.203: IC3.22 v46.47,27.19 | U4.55 18.03,20.07 20.32,17.78 45.95,17.78 46.47,18.3 v46.47,18.53
  Bottom 0.203: v46.47,27.19 v46.47,18.53
PG0
  Top 0.203: IC3.23 57.67,22.11 55.24,19.68 41.91,19.68 40.64,18.41 20.95,18.41 18.54,20.83 U4.56
PG1
  Top 0.203: IC3.24 57.17,29.23 56.52,28.57 56.52,22.23 54.61,20.32 41.91,20.32 40.64,19.05 21.59,19.05 19.02,21.61 U4.57
PG2  (via drill 0.5)
  Top 0.203: IC3.25 56.7,30.03 55.88,29.21 55.88,22.86 53.98,20.95 41.91,20.95 41.27,20.32 v38.73,20.32 | U4.87 30,35.08 31.11,36.2 v36.83,36.2
  Bottom 0.203: v36.83,36.2 36.83,33.66 37.47,33.02 37.47,28.57 38.1,27.94 38.1,23.5 37.47,22.86 37.47,21.59 v38.73,20.32
PG3  (via drill 0.5)
  Top 0.203: IC3.26 56.23,30.83 55.24,29.84 55.24,23.5 53.34,21.59 41.91,21.59 41.27,20.95 39.37,20.95 v38.73,21.59 | U4.88 29.87,35.59 31.11,36.83 35.56,36.83 36.2,37.47 36.83,37.47 v38.1,36.2
  Bottom 0.203: v38.73,21.59 38.73,27.94 38.1,28.57 v38.1,36.2
PG4  (via drill 0.5)
  Top 0.203: IC3.27 55.76,31.63 54.61,30.48 54.61,24.13 52.7,22.23 41.91,22.23 41.27,21.59 40.64,21.59 v40.01,22.23 | U4.89 29.72,36.07 31.11,37.47 35.56,37.47 36.2,38.1 37.47,38.1 v38.1,37.47
  Bottom 0.203: v38.1,37.47 39.37,36.2 39.37,33.66 38.73,33.02 38.73,28.57 40.01,27.3 v40.01,22.23
PG5  (via drill 0.5)
  Top 0.203: U4.90 20.57,36.58 v20.32,36.83 | v19.68,51.44 21.59,51.44 22.23,50.8 24.77,50.8 25.4,50.16 46.99,50.16 49.53,47.62 51.44,47.62 53.34,45.72 58.42,45.72 59.05,45.09 59.05,44.45 58.23,43.63 IC3.42
  Bottom 0.203: v20.32,36.83 19.05,38.1 19.05,50.8 v19.68,51.44
PG10  (via drill 0.5)
  Top 0.203: U4.125 18.54,48.77 v17.14,50.16 | v17.14,52.7 19.05,54.61 22.86,54.61 | 22.86,54.61 23.5,53.98 24.13,53.98 25.4,52.7 42.55,52.7 v43.18,53.34 | R10.1 21.59,55.88 22.86,54.61 | IC3.6 43.23,41.23 v43.18,41.27
  Bottom 0.203: v17.14,50.16 v17.14,52.7 | v43.18,53.34 v43.18,41.27
R_IN
  Top 0.406: U2.P$19 52.73,6.96 IN.1
R_OUT
  Top 0.406: OUT.1 25.4,2.54 30.48,2.54 32.38,4.45 35.56,4.45 36.12,5 U2.P$13
SWCLK  (via drill 0.5)
  Top 0.203: U4.109 28.5,47.55 v28.57,47.62
  Bottom 0.203: v28.57,47.62 28.57,52.07 30.48,53.98 34.29,53.98 SWD.2
SWDIO  (via drill 0.5)
  Top 0.203: U4.105 27.05,44.07 v26.04,45.09
  Bottom 0.203: 26.04,45.72 v26.04,45.09 26.04,50.16 26.67,50.8 26.67,52.7 27.94,53.98 29.21,53.98 SWD.4
SWO  (via drill 0.5)
  Top 0.203: U4.133 14.53,46.43 v15.24,45.72
  Bottom 0.203: SWD.6 17.14,55.24 14.61,52.7 14.61,46.35 v15.24,45.72
UART_RX  (via drill 0.5)
  Top 0.203: U4.136 13.03,46.02 v13.34,45.72
  Bottom 0.203: v13.34,45.72 13.34,53.34 UART.5
UART_TX  (via drill 0.5)
  Top 0.203: U4.137 12.52,46.18 v12.06,45.72
  Bottom 0.203: v12.06,45.72 11.43,45.72 10.79,46.35 10.79,53.34 UART.4
USB_DM  (via drill 0.5)
  Top 0.203: U4.103 31.65,43.08 v36.2,47.62 | v40.64,53.98 41.27,54.61 43.81,54.61 45.72,52.7 46.99,52.7 48.26,51.44 v49.53,51.44 R5.2
  Bottom 0.203: v40.64,53.98 39.37,52.7 36.83,52.7 36.2,52.07 v36.2,47.62 | USB.3 50.8,52.28 49.95,51.44 v49.53,51.44
USB_DP  (via drill 0.5)  (2 unrouted)
  Top 0.203: U4.104 30.89,43.59 v34.29,46.99 | R4.2 v49.53,52.7
  Bottom 0.203: v34.29,46.99 34.29,52.07 36.2,53.98 38.73,53.98 41.27,56.52 47.62,56.52
USB_ID  (via drill 0.5)
  Top 0.203: U4.102 32.41,42.57 v35.56,45.72 | U3.ID 54.59,52.09 53.98,52.7 53.98,53.98 54.61,54.61 54.61,55.88 53.98,56.52 46.99,56.52 USB.1
  Bottom 0.203: v35.56,45.72 35.56,46.99 34.92,47.62 34.92,52.07 36.2,53.34 38.73,53.34 40.64,55.24 USB.1
USB_VBUS  (via drill 0.5)
  Top 0.203: U4.101 33.2,42.09 v36.83,45.72 | 54.01,50.13 v53.98,50.16 | v49.53,53.98 52.07,53.98 USB.4
  Top 0.406: 54.01,50.13 U3.VBUS 55.91,50.13 56.52,49.53 v56.52,47.62
  Bottom 0.203: v36.83,45.72 36.83,46.99 38.1,48.26 39.37,48.26 40.64,49.53 40.64,52.7 42.55,54.61 43.81,54.61 44.45,53.98 v49.53,53.98
  Bottom 0.305: v53.98,50.16 53.98,54.61 USB.4
  Bottom 0.406: JP1.2 21.59,2.54 23.5,0.64 55.24,0.64 57.15,2.54 57.15,46.35 56.52,46.99 v56.52,47.62
VCAP1
  Top 0.305: U4.71 26.04,24.77 26.67,24.13 C20.2
VCAP2
  Top 0.203: C21.1 31.96,45.94
  Top 0.305: U4.106 30.61,44.58 31.96,45.94
VCC/2
  Top 0.406: U2.P$16 46.85,5 C309.1 48.05,2.46 C308.1
VDDA
  Top 0.305: C18.1 L3.1 6.35,24.77 5.71,25.4 5.71,29.21 6.1,29.59 U4.33 U4.32

## Text on the board
tPlace: PA4 | PA6 | PC4 | PB0 | PB2 | Rebel Technology | OWL Rev02 | PA3 | PA5 | PA7 | PC5 | PB1 | 5v | gnd | 3v3